# Altium PCB roneCPUBoard-v12.PcbDoc (part 2 of 3)
Units mil, origin at the board's own origin, x right, y up, seen from the top; angles counter-clockwise.
Board outline 3915.64 x 3915.87 mil, 2 copper layers (Top Layer, Bottom Layer); 205 components, 158 nets, 752 pads, 409 vias.
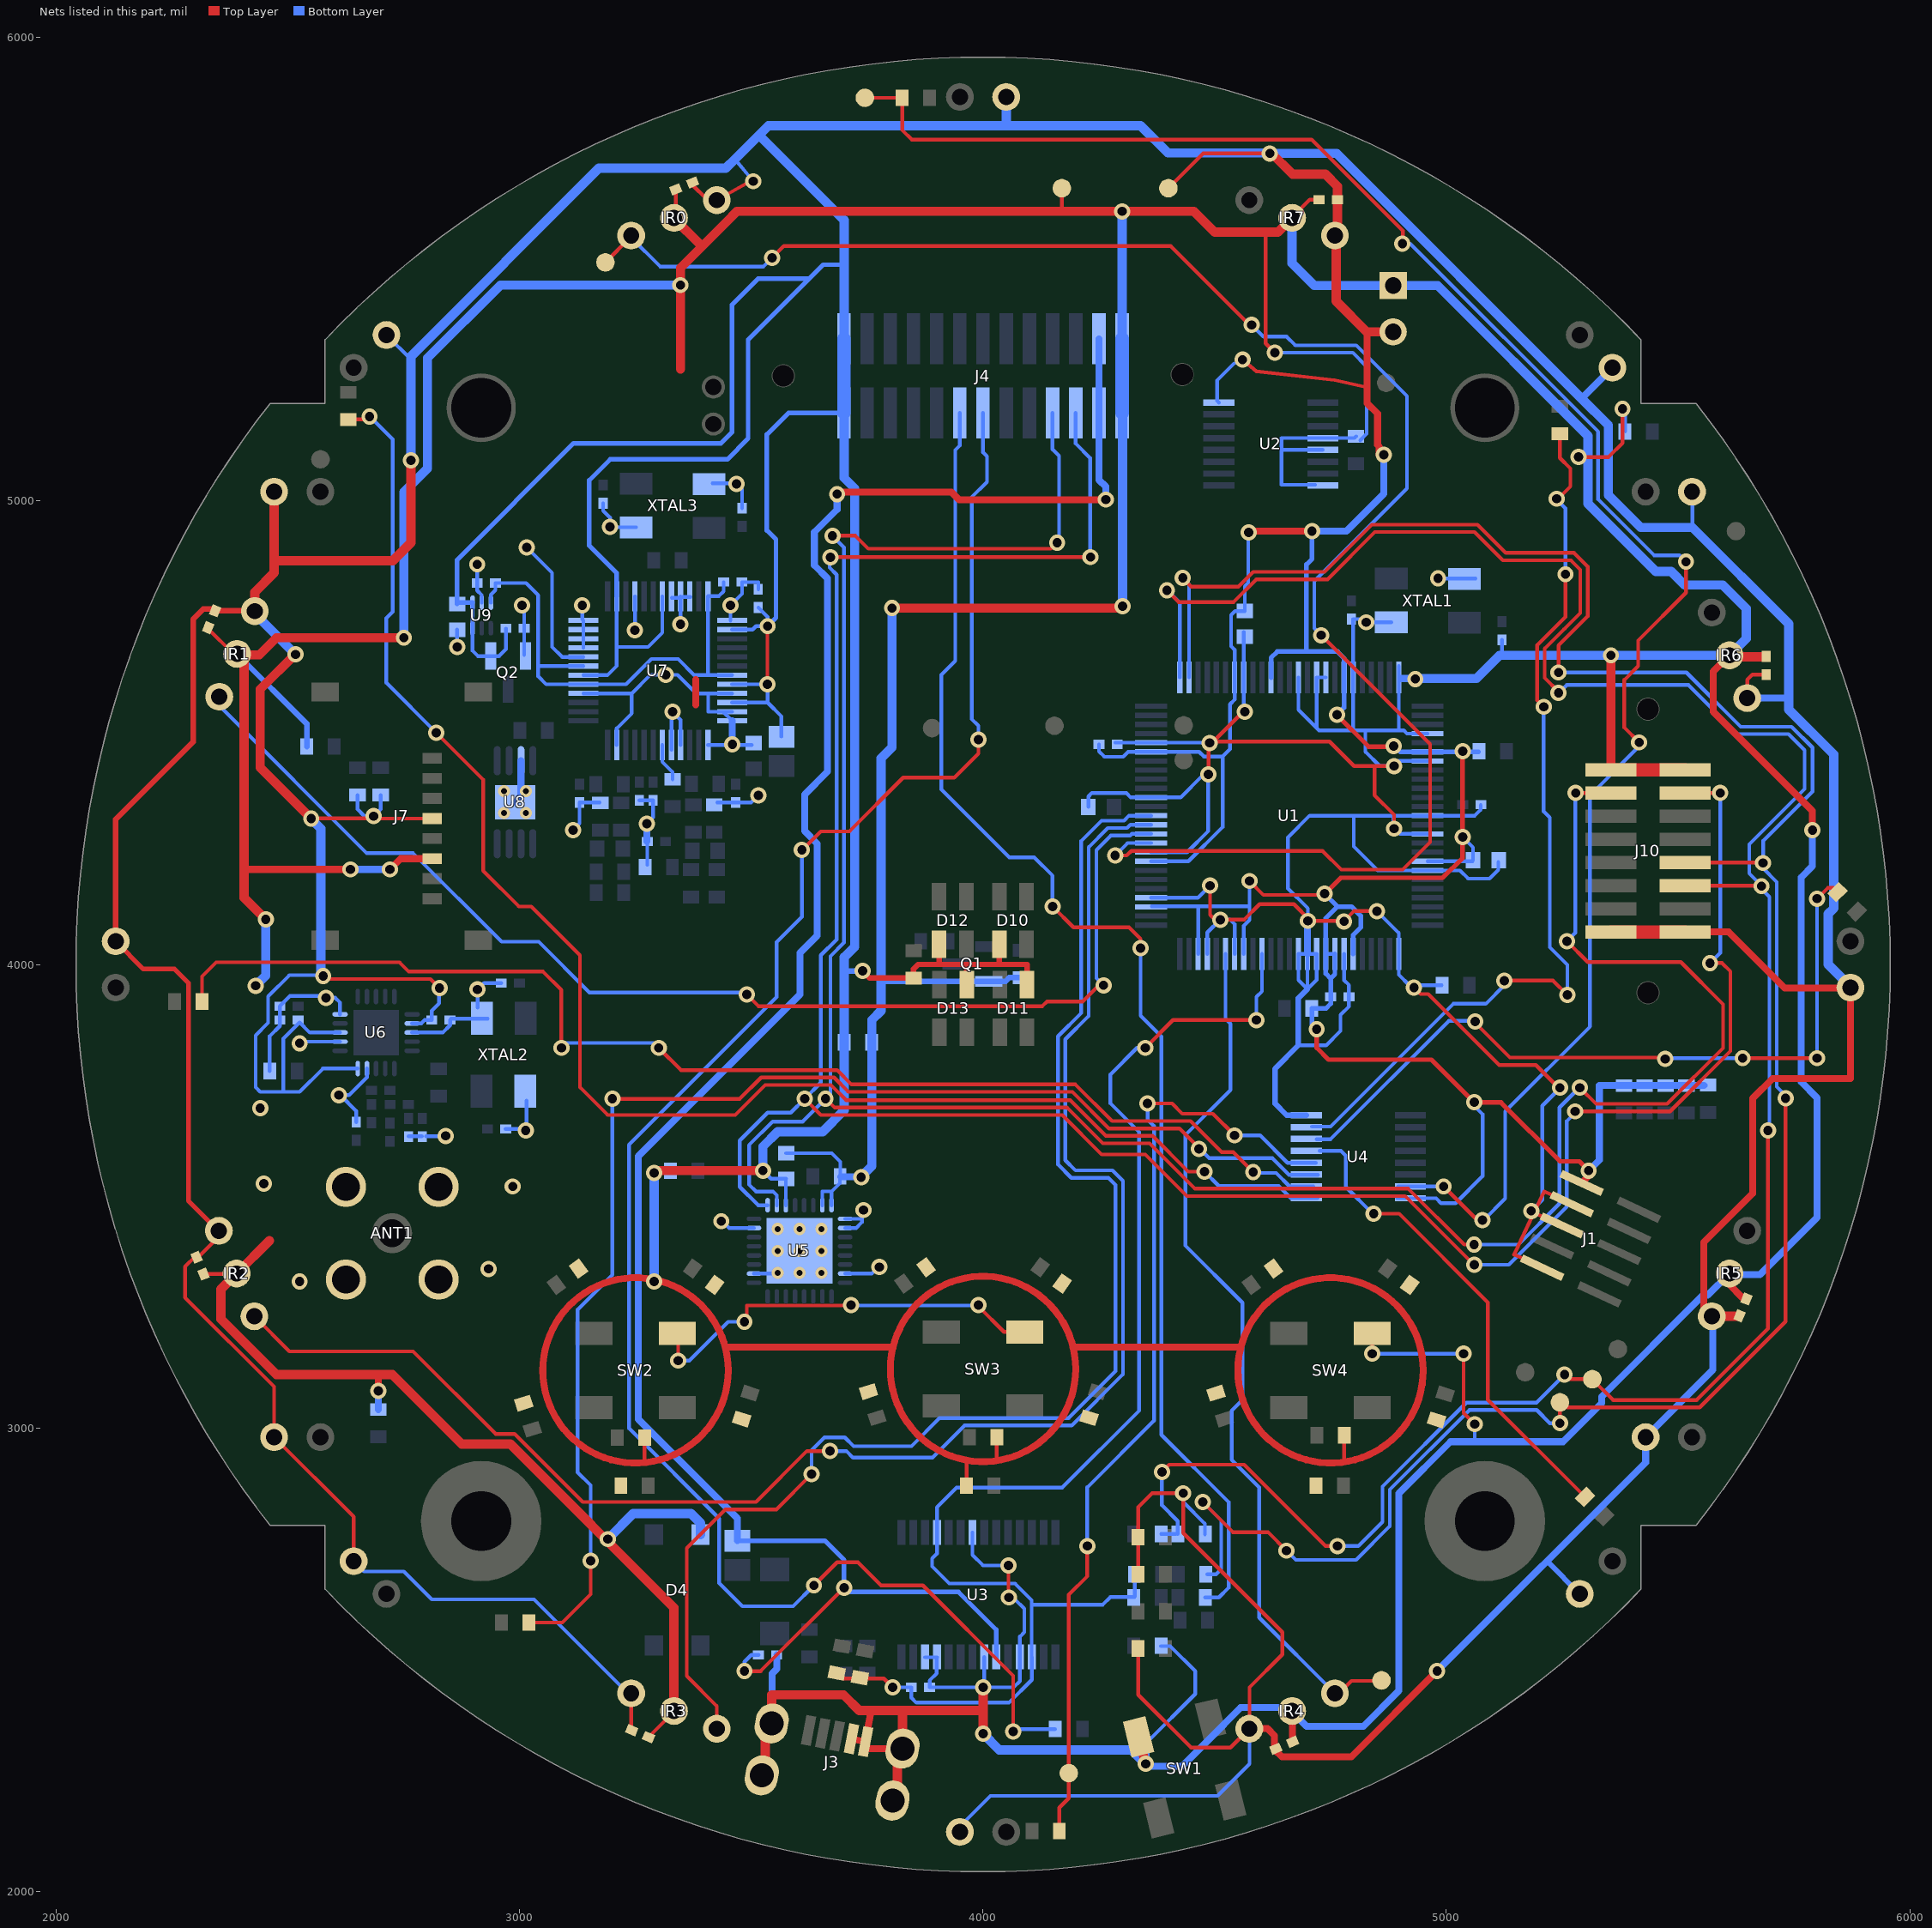
[diagram p2: the nets of this part, all layers, seen from the top]

## Via types
v1: diameter 35, hole 20, Top Layer to Bottom Layer, tented top, 392 vias
v2: diameter 25.98, hole 12.99, Top Layer to Bottom Layer, tented top, 17 vias

## Nets (pads, with @x,y where several pads share a name; then routed paths per layer and width w, separated by ;. In a path a pad name is that pad's centre, name@x,y a point inside that pad or via, vN(x,y) a via of type N, cw(c..) or ccw(c..) an arc to the next point about the centre after c; other vN are vias at no path point)
3.3V: C5.2 C6.2 C7.2 C8.2 C11.2 C12.2 C13.2 C14.2 C15.2 C16.2 C17.2 C18.2 C19.2 C20.2 C21.2 C31.2 C32.2 C42.1 D1.1 D3.1 D10.4 D11.4 D12.4 D13.4 D14.1 D15.1 D16.1 D17.1 D18.1 D19.1 D20.1 D21.1 D22.1 D23.1 D24.1 D25.1 D26.1 D27.1 D28.1 D29.1 D30.1 IR0.3 IR1.3 IR2.3 IR3.3 IR4.3 IR5.3 IR6.3 IR7.3 J1.1 J4.1 J4.2 J6.2 J7.4 J10.1 J10.2 L5.2 Q2.1 R1.2 R2.2 R3.2 R4.1 R7.2 R8.2 R9.2 R10.2 R11.2 R19.1 R34.2 R37.2 R39.2 R41.2 R43.2 R44.2 R45.2 R46.2 R50.2 T0.2 T1.2 T2.2 T3.2 T4.2 T5.2 T6.2 T7.2 T_1.1 U1.3 U1.8 U1.20 U1.32 U1.36 U1.44 U1.56 U1.68 U1.81 U1.83 U1.84 U1.93 U1.98 U2.16 U4.16 U5.27 U6.7 U6.15 U6.18 U7.6 U7.14 U7.19 U7.26 U7.32 U7.34 U9.1 U9.6 | length 170619.4
  Top Layer w8: C13.2@2300.33,3370.33 2278,3348 2278,3280.89 2470,3088.89 R41.2@2470,2980 2641.64,2808.36 T3.2@2641.64,2712.36 ; C13.2@2304.33,3366.33 IR2.3@2348.34,3410.34 ; v1@2551,4315 v1@2680,4315 ; v1@2582.5,3968.5 2807.5,3968.5 v1(2827,3949) ; v1@2690.12,4314.88 J7.4@2811.02,4314.88 ; C14.2@3240.61,2349.83 IR3.3@3240.61,2427.27 ; 3269.53,2926.47 R44.2@3269.53,2979 ; C11.2@3373.19,5681.81 IR0.3@3403,5652 ; IR0.3@3425.39,5649.27 v1@3502.53,5692.61 ; v1(3534.47,4604.47) v1@3534.47,4729.47 ; D20.1@3964.47,2875 3964.47,2927.47 ; 4029.53,2929.86 R45.2@4029.53,2980 ; D3.1@4335,2528 4335,2424 4449,2310 4533.88,2310 IR4.3@4574.61,2350.73 ; D26.1@4335,2685 4335,2829 4365,2859 v1@4430,2859 ; T_1.1@4400,5675 4475,5750 v1(4619,5750) ; v1(4432,2859) 4432,2773 4646,2559 4646,2511 4575,2440 IR4.3@4575,2351 ; v1(4560,5305) 4590,5280 4758.75,5260.75 4825,5246 ; v1(4575,4180) 4605,4150 v1@4740,4150 ; 4779.53,2927.53 R46.2@4779.53,2984 ; v1@5024,4460 v1@5035,4449 ; IR5.3@5555.53,3257.47 IR5.3@5572.56,3240.44 ; IR6.3@5649.27,4574.61 5649.27,4614.27 5660.31,4625.31 C18.2@5690,4625.31
  Top Layer w10: T2.2@2128,4050 2188,3990 2255,3990 2285,3960 2285,3490 IR2.3@2347,3428 ; v1(4720,3860) 4720,3820 4745.5,3794.5 4967.5,3794.5 5060,3702 5118,3702 5245,3575 5287,3575 v1(5307,3555) ; v1@4738,4153 4772,4187 4992,4187 5035,4230 5035,4263 v1@5023,4275 ; v1@4765,4537 4832,4470 v1@4886,4470 ; v1(5035,4275) v1@5035,4449
  Top Layer w12: T2.2@2128,4052 2128,4313 2295,4480 2295,4745 2317,4767 C12.2@2337,4767 ; C12.2@2342.53,4763.19 IR1.3@2417.81,4763.19 ; v1(3740,3985.94) 3755.47,3970.47 D14.1@3850,3970.47 3850,3990 3860,4000 3905,4000 ; D12.4@3905,4043.82 3905,4000 ; D13.4@3965,3967 3965,4000 ; D10.4@4035,4043.82 4035,4000 ; D11.4@4095,3956.18 4095,4000 4035,4000 ; 3905,4000 3965,4000 ; 3965,4000 4035,4000
  Top Layer w15: 3444,3174 3806,3174 ; 4194,3174 4552,3174 ; IR4.3@4575,2351 4614,2351 4629,2336 4629,2306 4645,2290 4795,2290 v1(4980,2475) ; v1@4576,4935 v1(4710,4935) ; 4830,5365 4829,5364 4829,5211 4851.5,5188.5 4851.5,5121.42 4855,5117.92 v1@4855,5100 ; J1.1@5291.87,3528.13 5307,3543.26 v1(5307,3555) ; J10.1@5515.02,4070 5609,4070 5730,3949 5872,3949 5872,3754 5704,3754 5661,3711 5661,3506 5555.53,3400.53 IR5.3@5555.53,3257.47 ; 3800,3127 cw(c4000,3127) 4200,3127 ; 3800,3127 cw(c4000,3127) 4200,3127 ; 3800,3127 cw(c4000,3127) 4200,3127 ; 3800,3127 cw(c4000,3127) 4200,3127 ; 3800,3127 cw(c4000,3127) 4200,3127 ; 3800,3127 cw(c4000,3127) 4200,3127 ; 3800,3127 cw(c4000,3127) 4200,3127 ; 3800,3127 cw(c4000,3127) 4200,3127 ; 3800,3127 cw(c4000,3127) 4200,3127 ; 3800,3127 cw(c4000,3127) 4200,3127 ; 3800,3127 cw(c4000,3127) 4200,3127 ; 3800,3127 cw(c4000,3127) 4200,3127 ; 3800,3127 cw(c4000,3127) 4200,3127 ; 3800,3127 cw(c4000,3127) 4200,3127 ; 3800,3127 cw(c4000,3127) 4200,3127 ; 3800,3127 cw(c4000,3127) 4200,3127 ; 3800,3127 cw(c4000,3127) 4200,3127 ; 3800,3127 cw(c4000,3127) 4200,3127 ; 3800,3127 cw(c4000,3127) 4200,3127 ; 3800,3127 cw(c4000,3127) 4200,3127 ; 3800,3127 cw(c4000,3127) 4200,3127 ; 3800,3127 cw(c4000,3127) 4200,3127 ; 3800,3127 cw(c4000,3127) 4200,3127 ; 3800,3127 cw(c4000,3127) 4200,3127 ; 3800,3127 cw(c4000,3127) 4200,3127 ; 3800,3127 cw(c4000,3127) 4200,3127 ; 3800,3127 cw(c4000,3127) 4200,3127 ; 3800,3127 cw(c4000,3127) 4200,3127 ; 3800,3127 cw(c4000,3127) 4200,3127 ; 3800,3127 cw(c4000,3127) 4200,3127 ; 3800,3127 cw(c4000,3127) 4200,3127 ; 3800,3127 cw(c4000,3127) 4200,3127 ; 3800,3127 cw(c4000,3127) 4200,3127 ; 3800,3127 cw(c4000,3127) 4200,3127 ; 3800,3127 cw(c4000,3127) 4200,3127 ; 3800,3127 cw(c4000,3127) 4200,3127 ; 3800,3127 cw(c4000,3127) 4200,3127 ; 3800,3127 cw(c4000,3127) 4200,3127 ; 3800,3127 cw(c4000,3127) 4200,3127 ; 3800,3127 cw(c4000,3127) 4200,3127 ; 3800,3127 cw(c4000,3127) 4200,3127 ; 3800,3127 cw(c4000,3127) 4200,3127 ; 3800,3127 cw(c4000,3127) 4200,3127 ; 3800,3127 cw(c4000,3127) 4200,3127 ; 3800,3127 cw(c4000,3127) 4200,3127 ; 3800,3127 cw(c4000,3127) 4200,3127 ; 3800,3127 cw(c4000,3127) 4200,3127 ; 3800,3127 cw(c4000,3127) 4200,3127 ; 3800,3127 cw(c4000,3127) 4200,3127 ; 3800,3127 cw(c4000,3127) 4200,3127 ; 3800,3127 cw(c4000,3127) 4200,3127 ; 3800,3127 cw(c4000,3127) 4200,3127 ; 3800,3127 cw(c4000,3127) 4200,3127 ; 3800,3127 cw(c4000,3127) 4200,3127 ; 3800,3127 cw(c4000,3127) 4200,3127 ; 3800,3127 cw(c4000,3127) 4200,3127 ; 3800,3127 cw(c4000,3127) 4200,3127 ; 3800,3127 cw(c4000,3127) 4200,3127 ; 3800,3127 cw(c4000,3127) 4200,3127 ; 3800,3127 cw(c4000,3127) 4200,3127 ; 3800,3127 cw(c4000,3127) 4200,3127 ; 3800,3127 cw(c4000,3127) 4200,3127 ; 3800,3127 cw(c4000,3127) 4200,3127 ; 3800,3127 cw(c4000,3127) 4200,3127 ; 3800,3127 cw(c4000,3127) 4200,3127 ; 3800,3127 cw(c4000,3127) 4200,3127 ; 3800,3127 cw(c4000,3127) 4200,3127 ; 3800,3127 cw(c4000,3127) 4200,3127 ; 3800,3127 cw(c4000,3127) 4200,3127 ; 3800,3127 cw(c4000,3127) 4200,3127 ; 3800,3127 cw(c4000,3127) 4200,3127 ; 3800,3127 cw(c4000,3127) 4200,3127 ; 3800,3127 cw(c4000,3127) 4200,3127 ; 3800,3127 cw(c4000,3127) 4200,3127 ; 3800,3127 cw(c4000,3127) 4200,3127 ; 3800,3127 cw(c4000,3127) 4200,3127 ; 3800,3127 cw(c4000,3127) 4200,3127 ; 3800,3127 cw(c4000,3127) 4200,3127 ; 3800,3127 cw(c4000,3127) 4200,3127 ; 3800,3127 cw(c4000,3127) 4200,3127 ; 3800,3127 cw(c4000,3127) 4200,3127 ; 3800,3127 cw(c4000,3127) 4200,3127 ; 3800,3127 cw(c4000,3127) 4200,3127 ; 3800,3127 cw(c4000,3127) 4200,3127 ; 3800,3127 cw(c4000,3127) 4200,3127 ; 3800,3127 cw(c4000,3127) 4200,3127 ; 3800,3127 cw(c4000,3127) 4200,3127 ; 3800,3127 cw(c4000,3127) 4200,3127 ; 3800,3127 cw(c4000,3127) 4200,3127 ; 3800,3127 cw(c4000,3127) 4200,3127 ; 3800,3127 cw(c4000,3127) 4200,3127 ; 3800,3127 cw(c4000,3127) 4200,3127 ; 3800,3127 cw(c4000,3127) 4200,3127 ; 3800,3127 cw(c4000,3127) 4200,3127 ; 3800,3127 cw(c4000,3127) 4200,3127 ; 3800,3127 cw(c4000,3127) 4200,3127 ; 3800,3127 cw(c4000,3127) 4200,3127 ; 3800,3127 cw(c4000,3127) 4200,3127 ; 3800,3127 cw(c4000,3127) 4200,3127 ; 3800,3127 cw(c4000,3127) 4200,3127 ; 3800,3127 cw(c4000,3127) 4200,3127 ; 3800,3127 cw(c4000,3127) 4200,3127 ; 3800,3127 cw(c4000,3127) 4200,3127 ; 3800,3127 cw(c4000,3127) 4200,3127 ; 3800,3127 cw(c4000,3127) 4200,3127 ; 3800,3127 cw(c4000,3127) 4200,3127 ; 3800,3127 cw(c4000,3127) 4200,3127 ; 3800,3127 cw(c4000,3127) 4200,3127 ; 3800,3127 cw(c4000,3127) 4200,3127 ; 3800,3127 cw(c4000,3127) 4200,3127 ; 3800,3127 cw(c4000,3127) 4200,3127 ; 3800,3127 cw(c4000,3127) 4200,3127 ; 3800,3127 cw(c4000,3127) 4200,3127 ; 3800,3127 cw(c4000,3127) 4200,3127 ; 3800,3127 cw(c4000,3127) 4200,3127 ; 3800,3127 cw(c4000,3127) 4200,3127 ; 3800,3127 cw(c4000,3127) 4200,3127 ; 3800,3127 cw(c4000,3127) 4200,3127 ; 3800,3127 cw(c4000,3127) 4200,3127 ; 3800,3127 cw(c4000,3127) 4200,3127 ; 3800,3127 cw(c4000,3127) 4200,3127 ; 3800,3127 cw(c4000,3127) 4200,3127 ; 3800,3127 cw(c4000,3127) 4200,3127 ; 3800,3127 cw(c4000,3127) 4200,3127 ; 3800,3127 cw(c4000,3127) 4200,3127 ; 3800,3127 cw(c4000,3127) 4200,3127 ; 3800,3127 cw(c4000,3127) 4200,3127 ; 3800,3127 cw(c4000,3127) 4200,3127 ; 3800,3127 cw(c4000,3127) 4200,3127 ; 3800,3127 cw(c4000,3127) 4200,3127 ; 3800,3127 cw(c4000,3127) 4200,3127 ; 3800,3127 cw(c4000,3127) 4200,3127 ; 3800,3127 cw(c4000,3127) 4200,3127 ; 3800,3127 cw(c4000,3127) 4200,3127 ; 3800,3127 cw(c4000,3127) 4200,3127 ; 3800,3127 cw(c4000,3127) 4200,3127 ; 3800,3127 cw(c4000,3127) 4200,3127 ; 3800,3127 ccw(c4000,3127) 4200,3127 ; 3800,3127 ccw(c4000,3127) 4200,3127 ; 3800,3127 ccw(c4000,3127) 4200,3127 ; 3800,3127 ccw(c4000,3127) 4200,3127 ; 3800,3127 ccw(c4000,3127) 4200,3127 ; 3800,3127 ccw(c4000,3127) 4200,3127 ; 3800,3127 ccw(c4000,3127) 4200,3127 ; 3800,3127 ccw(c4000,3127) 4200,3127 ; 3800,3127 ccw(c4000,3127) 4200,3127 ; 3800,3127 ccw(c4000,3127) 4200,3127 ; 3800,3127 ccw(c4000,3127) 4200,3127 ; 3800,3127 ccw(c4000,3127) 4200,3127 ; 3800,3127 ccw(c4000,3127) 4200,3127 ; 3800,3127 ccw(c4000,3127) 4200,3127 ; 3800,3127 ccw(c4000,3127) 4200,3127 ; 3800,3127 ccw(c4000,3127) 4200,3127 ; 3800,3127 ccw(c4000,3127) 4200,3127 ; 3800,3127 ccw(c4000,3127) 4200,3127 ; 3800,3127 ccw(c4000,3127) 4200,3127 ; 3800,3127 ccw(c4000,3127) 4200,3127 ; 3800,3127 ccw(c4000,3127) 4200,3127 ; 3800,3127 ccw(c4000,3127) 4200,3127 ; 3800,3127 ccw(c4000,3127) 4200,3127 ; 3800,3127 ccw(c4000,3127) 4200,3127 ; 3800,3127 ccw(c4000,3127) 4200,3127 ; 3800,3127 ccw(c4000,3127) 4200,3127 ; 3800,3127 ccw(c4000,3127) 4200,3127 ; 3800,3127 ccw(c4000,3127) 4200,3127 ; 3800,3127 ccw(c4000,3127) 4200,3127 ; 3800,3127 ccw(c4000,3127) 4200,3127 ; 3800,3127 ccw(c4000,3127) 4200,3127 ; 3800,3127 ccw(c4000,3127) 4200,3127 ; 3800,3127 ccw(c4000,3127) 4200,3127 ; 3800,3127 ccw(c4000,3127) 4200,3127 ; 3800,3127 ccw(c4000,3127) 4200,3127 ; 3800,3127 ccw(c4000,3127) 4200,3127 ; 3800,3127 ccw(c4000,3127) 4200,3127 ; 3800,3127 ccw(c4000,3127) 4200,3127 ; 3800,3127 ccw(c4000,3127) 4200,3127 ; 3800,3127 ccw(c4000,3127) 4200,3127 ; 3800,3127 ccw(c4000,3127) 4200,3127 ; 3800,3127 ccw(c4000,3127) 4200,3127 ; 3800,3127 ccw(c4000,3127) 4200,3127 ; 3800,3127 ccw(c4000,3127) 4200,3127 ; 3800,3127 ccw(c4000,3127) 4200,3127 ; 3800,3127 ccw(c4000,3127) 4200,3127 ; 3800,3127 ccw(c4000,3127) 4200,3127 ; 3800,3127 ccw(c4000,3127) 4200,3127 ; 3800,3127 ccw(c4000,3127) 4200,3127 ; 3800,3127 ccw(c4000,3127) 4200,3127 ; 3800,3127 ccw(c4000,3127) 4200,3127 ; 3800,3127 ccw(c4000,3127) 4200,3127 ; 3800,3127 ccw(c4000,3127) 4200,3127 ; 3800,3127 ccw(c4000,3127) 4200,3127 ; 3800,3127 ccw(c4000,3127) 4200,3127 ; 3800,3127 ccw(c4000,3127) 4200,3127 ; 3800,3127 ccw(c4000,3127) 4200,3127 ; 3800,3127 ccw(c4000,3127) 4200,3127 ; 3800,3127 ccw(c4000,3127) 4200,3127 ; 3800,3127 ccw(c4000,3127) 4200,3127 ; 3800,3127 ccw(c4000,3127) 4200,3127 ; 3800,3127 ccw(c4000,3127) 4200,3127 ; 3800,3127 ccw(c4000,3127) 4200,3127 ; 3800,3127 ccw(c4000,3127) 4200,3127 ; 3800,3127 ccw(c4000,3127) 4200,3127 ; 3800,3127 ccw(c4000,3127) 4200,3127 ; 3800,3127 ccw(c4000,3127) 4200,3127 ; 3800,3127 ccw(c4000,3127) 4200,3127 ; 3800,3127 ccw(c4000,3127) 4200,3127 ; 3800,3127 ccw(c4000,3127) 4200,3127 ; 3800,3127 ccw(c4000,3127) 4200,3127 ; 3800,3127 ccw(c4000,3127) 4200,3127 ; 3800,3127 ccw(c4000,3127) 4200,3127 ; 3800,3127 ccw(c4000,3127) 4200,3127 ; 3800,3127 ccw(c4000,3127) 4200,3127 ; 4200,3127 ccw(c4000,3127) 4200,3127 ; 3450,3124 ccw(c3250,3124) 3450,3124 ; 4950,3124 ccw(c4750,3124) 4950,3124
  Top Layer w20: IR1.3@2428.27,4762.39 2428.27,4803.27 2470,4845 R37.2@2470,5020 ; 2476.19,4871.19 2726.2,4871.19 2765,4909.98 v1(2765,5088) ; v1@2516.08,4669.92 2440,4593.83 2440,4425 v1(2550,4315) ; v1@3296,3555 v1(3525,3555) ; v1@4622,5751 4668,5705 4739,5705 4765,5679 C17.2@4765,5650 ; IR7.3@4762,5574.12 4762,5431 4829,5364 ; IR7.3@4764.69,5580.69 C17.2@4764.69,5650 ; 4830,5365 J6.2@4885,5365 ; IR5.3@5572.73,3240.61 C16.2@5629.61,3240.61
  Top Layer w29: J10.2@5354.98,4070 J10.1@5515.02,4070
  Bottom Layer w8: v1@2574,3977 2503,3977 2457,3931 2457,3873.93 2430,3846.93 2430,3735 2440,3725 2490,3725 ; U6.18@2612.24,3853 2547,3853 2525,3875 2490,3840 2490,3725 ; T3.2@2641.64,2712.36 2664,2690 2750,2690 2810,2630 3031,2630 IR3.3@3232.12,2428.88 ; R1.2@2650,4365.47 2650,4335 2665,4320 v1(2685,4320) 2700,4335 R2.2@2700,4365 ; U6.15@2650.63,3775.24 2575.24,3775.24 2525,3725 2490,3725 ; T1.2@2712.36,5358.36 2764.71,5306 ; U6.7@2767.76,3872.69 2787.69,3872.69 2795,3880 C21.2@2810.31,3880 ; C21.2@2810,3880.31 2810,3900 2826,3916 v1@2826,3947 ; U9.1@2898.31,4780.56 U9.6@2898.31,4725.44 2898.31,4676.69 2909.57,4665.43 Q2.1@2937.6,4665.43 2955.43,4665.43 2970.31,4680.31 C32.2@2970.31,4725 ; U7.6@3137.57,4624.16 3189.16,4624.16 3209.42,4644.42 3209.42,4685 ; U7.14@3209.42,4794.43 3209.42,4685 ; U7.19@3307.84,4794.43 3307.84,4715.84 3277,4685 3209.42,4685 ; U7.34@3458.43,4565.1 3534.9,4565.1 ; U7.32@3458.43,4604.47 v1(3534.47,4604.47) ; U7.26@3458.43,4722.58 3502.58,4722.58 3510,4730 v1(3535,4730) 3535,4750 C31.2@3515,4770 ; 3465,5738 v1(3504,5690) ; v1(3525,3555) 3542.56,3537.44 C19.2@3575,3537.44 ; v1@3534.9,4604.05 3534.9,4565.1 ; L5.2@3564.9,4491.5 3564.9,4535.1 3534.9,4565.1 ; U5.27@3574.47,3480.43 C19.2@3574.47,3533.47 ; T4.2@3950,2140 4016,2206 4506,2206 4575,2275 IR4.3@4575,2351 ; C5.2@4250.31,4475 4250.31,4459.69 4262,4448 4302.37,4448 4313.17,4458.8 4466.48,4458.8 4476.78,4448.5 4517,4448.5 ; U1.8@4362.77,4222.57 4443.2,4222.57 4517,4296.37 4517,4448.5 ; U1.3@4364.12,4125.5 4575,4125.5 ; v1(4432,2859) 4432,2840 4479,2793 R19.1@4479,2770 ; U1.98@4464.5,4022.5 4464.5,4125 ; U2.16@4508.8,5212.57 4505,5216.36 4505,5260 4542,5297 ; U1.93@4562.57,4022.77 4562.57,4083.29 4575,4095.72 4575,4125.5 ; v1@4572.5,4935.72 4572.5,4823.5 4565,4816 C7.2@4565,4762.56 4543.93,4762.56 4535.28,4753.91 4535.28,4686.72 4542.89,4679.11 4542.89,4571.46 4533.07,4561.65 4533.07,4464.57 4517,4448.5 ; v1(4575,4180) 4575,4125.5 ; U1.84@4739.74,4022.77 U1.83@4759.43,4022.77 ; U4.16@4893.66,3495.43 4977.85,3495.43 4988.28,3485 5020,3485 5078,3543 5078,3677 v1@5060,3695 ; U1.68@4959.23,4222.57 C8.2@5056.57,4222.57 ; v1(5035,4275) 5057.44,4252.56 C8.2@5057.44,4225 ; 5531,4943 R39.2@5531,5012
  Bottom Layer w10: C42.1@2865,4777.56 2865,4873 3116.5,5124.5 3434.5,5124.5 3458,5148 3458,5423 3515,5480 3625,5480 ; C42.1@2868,4780.56 U9.1@2898.31,4780.56 ; U7.14@3209.42,4794.43 3209.42,4844.42 3150,4903.83 3150,5044.72 3195.28,5090 3448.08,5090 3493,5134.92 3493,5348 3625,5480 ; v1(3535,4730) 3553,4748 3553,4917 3533.5,4936.5 3533.5,5143.5 3579.98,5189.98 J4.2@3700,5189.98 ; 3700,5510 3655,5510 3625,5480 ; U1.36@4621.63,4619.23 4621.63,4661.63 4635,4675 4698,4675 ; v1(4710,4935) 4710,4875 4698,4863 4698,4675 ; v1(4720,3860) 4709.53,3870.47 R4.1@4709.53,3905 4740,3905 4750.31,3915.31 C6.2@4750.31,3930 4750.31,3969.69 ; v1@4736.64,4152.64 4764.64,4124.64 ; U1.83@4759.43,4022.77 4759.43,3978.8 4750.31,3969.69 ; v1(4764,4539) 4779.11,4554.11 U1.44@4779.11,4619.23 4779.11,4660.89 4765,4675 4698,4675 ; U1.81@4798.8,4022.77 4798.8,4063.8 4815,4080 4815,4105 4795.36,4124.64 4764.64,4124.64 ; v1@4890,4469 4900.2,4458.8 U1.56@4959.23,4458.8 R3.2@5068.8,4458.8 ; 4750.31,3969.69 4739.74,3980.26 U1.84@4739.74,4022.77 4739.74,4099.74 4764.64,4124.64
  Bottom Layer w12: 3701.42,3985.94 v1(3740,3985.94) ; 5220,2710 T5.2@5287.64,2641.64
  Bottom Layer w15: v1@3282,3320 v1@3290,3328 ; v1@3290,3555 R34.2@3325.47,3555 ; v1(4710,4935) 4784.67,4935 4865,5015.33 v1(4865,5100) ; v1@4987.4,2482.4 5430,2925 R43.2@5430,2975 ; 5291.86,5221.14 T7.2@5358.36,5287.64 ; v1@5307.5,3555.5 5330,3578 5330,3739 5473,3739 R11.2@5556,3739 ; R43.2@5430,2980 5575,3125 IR5.3@5575,3240 ; IR6.3@5649.27,4574.61 5739,4574.61
  Bottom Layer w20: IR1.3@2428.27,4756.73 v1(2516,4669) ; v1@2546.5,4317.5 2571,4293 v1@2571,3980 ; v1(2765,5088) 2765,5312 3171,5718 3445,5718 3465,5738 3516.66,5789.66 ; v1@3290,3328 v1(3290,3550) ; v1(3525,3555) 3525,3607 3557,3639 3654,3639 3700,3685 R50.2@3700,3831.53 ; J4.2@3700,5180 3700,5050.2 3723,5027.2 3723,4038 3700.47,4015.47 R50.2@3700.47,3832 ; J4.1@3700,5350.02 3700,5510 3700,5606.31 3516.66,5789.66 ; T0.2@4050,5872 4050,5810 ; v1@4616,5751 4399,5751 4340,5810 4050,5810 ; v1@4627,5750 4763,5750 5291.86,5221.14 5349.5,5163.5 5349.5,5012.73 5419.23,4943 5531,4943 5739,4735 5739,4574.61 5739,4550 5836,4453 5836,4121 5824,4109 5824,4000 T6.2@5872,3952 ; 3516.66,5789.66 3537,5810 4050,5810
  Bottom Layer w29.14: J4.2@3700,5189.98 J4.1@3700,5350.02
  other v1: 3290,3316 5060,3703 2576,3975 4737,4153 5035,4460 4886,4471 4573,4932
3.3V_FTDI: C10.2 D8.1 D9.1 R15.1 R18.1 U1.91 U3.4 U3.17 | length 3094.4
  Top Layer w8: D9.1@3685.21,2471.79 3697.93,2459.07 3759.04,2459.07 ; 3753,2459 3786,2459 v1(3805,2440) ; v1(4350,3820) 4410,3880 v1@4589,3880
  Bottom Layer w8: v1(3805,2440) C10.2@3845.31,2440 3845.31,2417.69 3856,2407 4055.75,2407 4105.16,2456.41 U3.17@4105.16,2505.55 ; U3.17@4105,2506 4105,2628 4069,2664 3927,2664 3890,2701 3890,2718.13 3900.43,2728.57 U3.4@3900.43,2774.45 3900.43,2828.57 3942.87,2871 4170.75,2871 4337,3037.25 4337,3638 4275,3700 4275,3762.72 4332.28,3820 v1(4350,3820) ; 4105,2618.5 4258.5,2618.5 4275,2635 R15.1@4327,2635 ; R15.1@4327.47,2636.47 R18.1@4327.47,2683 ; v1(4590,3880) 4590,3930 4601.94,3941.94 U1.91@4601.94,4022.77
5VUSB: C9.2 J4.23 J4.24 L1.2 U3.20 | length 4587.3
  Top Layer w8: v1(3485,2475) 3520,2475 v1(3700,2655)
  Top Layer w15: v1@3681,5019 3932,5019 3948.5,5002.5 v1@4265,5002.5
  Bottom Layer w8: v1(3485,2475) 3485,2495 3500,2510 C9.2@3515.31,2510
  Bottom Layer w10: L1.2@3470,2756.5 3658.5,2756.5 3700,2715 v1(3700,2655) ; v1@3705,2655 3714,2646 3947,2646 4028.39,2564.61 U3.20@4028.39,2505.55
  Bottom Layer w15: L1.2@3470,2756.5 3470,2805 3256,3019 3256,3586 3605,3935 3605,4025 3642,4062 3642,4260.67 3615,4287.67 3615,4366.67 3664.5,4416.17 3664.5,4832.92 3636,4861.42 3636,4932.67 3685,4981.67 v1(3685,5015) ; J4.24@4250,5189.98 J4.23@4250,5350.02 ; J4.24@4250.5,5189.48 4250.5,5045.5 4265,5031 v1(4265,5003)
CHRG: J4.14 R13.1 | length 4048
  Top Layer w8: v1@3610,4247 3650,4287 3711.63,4287 3827.63,4403 3938,4403 3990,4455 v1(3990,4485) ; v1(3635,2660) 3685,2710 3730,2710 3780,2660 3870,2660 4065,2465 v1(4065,2345)
  Bottom Layer w8: v1(3609,4247) 3609,4102.72 3554.5,4048.22 3554.5,3929.5 3236,3611 3236,2999 3430.44,2804.56 3430.44,2664.91 3480.35,2615 3590,2615 v1(3635,2660) ; v1(3990,4485) 3990,4515 3975.5,4529.5 3975.5,5008.13 4008.5,5041.13 4008.5,5096.5 4000,5105 J4.14@4000,5189.98 ; v1@4065,2350 R13.1@4155.47,2350
CVDD: C33.2 C34.2 U7.5 U7.7 U7.24 U7.31 U9.3 | length 1110.5
  Bottom Layer w8: U9.3@2937.69,4780.56 2937.69,4797.69 2947.69,4807.69 C34.2@2947.69,4823 3013.72,4823 3040,4796.72 3040,4643.84 ; U7.7@3137.57,4643.84 3040,4643.84 ; 3406.27,4626.27 U7.24@3406.27,4794.43 ; U7.24@3406.83,4795 3430,4795 3440,4805 C33.2@3440,4825 ; U7.31@3458.43,4624.16 3376.84,4624.16 3342,4659 3284,4659 3229.47,4604.47 U7.5@3137.57,4604.47 3057.09,4604.47 3040,4621.56 3040,4643.84
DREQ: U7.8 | length 314.2
  Bottom Layer w8: v1(3015,4900) 3070,4845 3070,4685 3091.47,4663.53 U7.8@3137.57,4663.53
FTDI_RESET: D5.1 J4.12 | length 2969.3
  Top Layer w8: v1(4150,4125) 4195,4080 4315,4080 4340,4055 v1(4340,4035)
  Bottom Layer w8: J4.12@3950,5189.98 3950,5120 3940,5110 3940,4655 3910,4625 3910,4377.65 4056.65,4231 4110.37,4231 4150,4191.37 v1(4150,4125) ; v1(4340,4035) 4340,3889.35 4385,3844.35 4385,2985 4530,2840 4530,2655 4509,2634 D5.1@4479.53,2634
FTDI_RX: D6.2 J10.5 R19.2 T_RX1.1 U1.26 | length 5425.7
  Top Layer w8: v1(4386,2905) 4401.5,2920.5 4563.5,2920.5 4739,2745 v1(4765,2745) ; v1(4397,4807) 4422,4782 4540.75,4782 4589.75,4831 4743.6,4831 4845.6,4933 5060.63,4933 5121.63,4872 5268.72,4872 5289,4851.72 5289,4758.14 5254.87,4724.01 ; v1@5242,4588.28 5212,4618.28 5212,4681.63 5254.38,4724.01 ; v1(5255,3115) 5265,3105 T_RX1.1@5315,3105 5360,3060 5540,3060 5694,3214 v1(5694,3642) ; J10.5@5515.02,4170 v1@5680,4170
  Bottom Layer w8: D6.2@4384.53,2771 R19.2@4416,2771 ; v1(4386,2905) 4386,2833 4420,2799 R19.2@4420,2771 ; v1@4398,4807 4424.78,4780.22 U1.26@4424.78,4619.23 ; v1(4765,2745) 4810,2745 4862,2797 4862,2873.35 5043.15,3054.5 5194.5,3054.5 v1(5255,3115) ; v1@5243,4586 5260,4603 5522.37,4603 5628.37,4497 5738.26,4497 5773,4462.26 5773,4378.63 5653.5,4259.13 5653.5,4196.5 v1@5680.5,4169.5 ; v1@5680,4162.72 5697,4145.72 v1@5697,3642
  other v1: 5680,4169 5242,4586
FTDI_TX: D7.1 J10.7 T_TX1.1 U1.27 | length 5361.4
  Top Layer w8: v1@4431,4833 4449,4815 4551.12,4815 4583.12,4847 4736.97,4847 4838.97,4949 5067.25,4949 5128.25,4888 5275.35,4888 5305,4858.35 5305,4751.51 5242,4688.51 v1(5242,4630) ; v1(4474,2840) 4539,2775 4615,2775 v1(4655,2735) ; T_TX1.1@5240,3065 5261,3044 5546.63,3044 5732,3229.37 v1(5732,3711) ; v1(5245,3010) T_TX1.1@5245,3055 ; J10.7@5515.02,4220 v1@5682,4220
  Bottom Layer w8: v1(4431,4834) 4444.46,4820.54 U1.27@4444.46,4619.23 ; v1(4474,2840) 4514,2800 4514,2695 4503,2684 D7.1@4484,2684 ; v1(4655,2735) 4675,2715 4805,2715 4878,2788 4878,2866.72 5049.78,3038.5 5194.78,3038.5 5223.28,3010 v1(5245,3010) ; v1(5242,4630) 5518,4630 5635,4513 5744.89,4513 5790,4467.89 5790,4373 5684,4267 v1@5684,4219 ; v1(5683,4219) 5683,4207.72 5713,4177.72 5713,3736 v1@5732,3717
GBUF: R54.1 U7.42 | length 83.2
  Bottom Layer w8: U7.42@3307.84,4473.57 3307.84,4437.16 3330,4415 R54.1@3330,4399.53
GND: ANT1.2 ANT1.3 ANT1.4 ANT1.5 C1.1 C2.1 C3.1 C4.1 C5.1 C6.1 C7.1 C8.1 C9.1 C10.1 C11.1 C12.1 C13.1 C14.1 C15.1 C16.1 C17.1 C18.1 C19.1 C20.1 C21.1 C22.1 C23.1 C24.1 C25.1 C26.1 C28.1 C29.2 C30.2 C31.1 C32.1 C33.1 C34.1 C35.2 C36.1 C37.1 C38.2 C39.2 C40.2 C41.1 C42.2 D4.2 IR0.2 IR1.2 IR2.2 IR3.2 IR4.2 IR5.2 IR6.2 IR7.2 J1.3 J1.5 J1.9 J3.4 J3.5 J3.6 J3.7 J3.8 J3.9 J4.25 J4.26 J6.1 J7.6 J10.15 J10.16 Q1.2 Q2.2 R6.1 R12.1 R33.1 R35.1 R36.2 R38.2 R40.2 R42.2 R47.1 R50.1 R61.1 R62.1 SW1.2 SW2.2 SW3.2 SW4.2 T_GND1.1 U1.4 U1.9 U1.15 U1.21 U1.33 U1.39 U1.41 U1.42 U1.45 U1.50 U1.54 U1.57 U1.63 U1.65 U1.69 U1.76 U1.82 U1.85 U1.86 U1.87 U1.94 U1.97 U2.4 U2.5 U2.8 U3.7 U3.18 U3.21 U3.25 U3.26 U4.8 U5.1 U5.2 U5.7 U5.18 U5.23 U5.31 U5.32 U5.33 U6.8 U6.14 U6.17 U6.20 U7.4 U7.9 U7.10 U7.11 U7.12 U7.16 U7.20 U7.21 U7.22 U7.25 U7.33 U7.35 U7.36 U7.37 U7.40 U7.41 U7.47 U8.7 U8.9 U9.2 XTAL1.2 XTAL1.4 XTAL2.2 XTAL2.4 XTAL3.2 XTAL3.4 | length 32984.2
  Top Layer w8: C13.1@2317.53,3331.81 IR2.2@2385.81,3331.81 ; C12.1@2327.47,4724.53 IR1.2@2382,4670 ; C14.1@3278.19,2332.47 IR3.2@3330,2384.28 ; IR0.2@3336.81,5613.81 C11.1@3336.81,5672.47 ; v1(3342,3145) SW2.2@3342,3204 ; v1@3490,3238 3490,3264 v1@3715,3264 ; J3.4@3715.93,2329.04 J3.4@3715.93,2347 ; v1@3990,3262 4045,3207 SW3.2@4090,3207 ; v1@4055,2635 v1(4055,2703) ; 4170,5625 T_GND1.1@4170,5675 ; v1@4487,4406 v1@4487,4478 ; v1(4490,4170) 4490,4107 v1@4503,4094 ; v1@4513,4097 4564,4097 4597,4130 4671,4130 v1@4705,4096 ; v1@4562.57,4546.57 4497,4481 4747.72,4481 4800.72,4428 4845,4428 ; 4610,5580 4610,5340 v1(4630,5320) ; IR7.2@4667,5612 4705,5650 C17.1@4725.32,5650 ; v1@4702,4094 v1@4778,4094 ; v1@4780,4095 4800,4115 v1(4850,4115) ; v1(4840,3160) SW4.2@4840,3204 ; v1@4887,4308 4887,4323 4845,4365 4845,4428 ; v1(4887,4428) 4845,4428 ; v1(4930,3950) 4944,3936 4960.88,3936 5113.88,3783 5193,3783 v1@5242,3734 ; v1(5037,3160) 5037,3032 v1(5061,3008) ; v1@5189.2,3464.38 5146,3374 J1.9@5206.29,3345.62 ; v1@5190,3464 J1.5@5249.27,3436.78 ; v1@5189.98,3466.02 5211,3510 J1.3@5270.57,3482.46 ; v1(5285,5095) 5350,5095 5380,5125 v1(5380,5199)
  Top Layer w15: 2405,4205 v1(2635,4205) ; v1(2695,3080) 2695,3115 ; v1(2720,4205) 2743.27,4228.27 J7.6@2811.02,4228.27 ; 3380,4560 3380,4615 ; J3.4@3715.93,2329.04 J3.5@3744,2323 ; J3.5@3746.86,2307.83 3815,2307.83 J3.9@3826.11,2307.83 ; J3.5@3746.86,2328.09 3759,2390 ; C15.1@4668,2329 IR4.2@4668,2390 ; IR6.2@5608,4664 5576,4632 5576,4545.53 5790,4331.53 v1(5790,4290) ; IR5.2@5611,3333 5611,3309 5639,3281 C16.1@5646,3281
  Top Layer w20: IR1.2@2391,4668 IR1.2@2405,4668 ; v1(2452,4097) 2405,4144 2405,4205 IR1.2@2405,4668 ; 2460,3404 IR2.2@2389,3333 2355,3299 2355,3235 2475,3115 2695,3115 2725,3115 2875,2965 2979.79,2965 3333,2611.79 IR3.2@3333,2392 ; v1(2750,4705) 2475,4705 2438,4668 IR1.2@2405,4668 ; IR0.2@3333,5610 3390,5553 ; 3347,5285 v1(3347,5466) 3347,5503 3445.27,5601.27 3469,5625 4170,5625 v1(4300,5625) 4455,5625 4500,5580 4610,5580 4636,5580 IR7.2@4667,5611 IR7.2@4655,5611 ; J3.7@3530,2239 J3.6@3530,2348.28 ; J3.6@3543.89,2362.17 3543.89,2423.89 3698.89,2423.89 3732.78,2390 3759,2390 4000,2390 ; v1(3803.5,4769) 4291,4769 v1@4300,4778 ; J3.8@3815,2206.2 J3.9@3815,2307.83 ; J3.9@3826.11,2307.83 3826.11,2388.89 ; v1(4000,2340) 4000,2390 ; v1(4000,2440) 4000,2390 ; SW1.2@4335.6,2332.97 v1(4351,2275) ; J10.16@5354.98,4420 v1(5355,4667) ; IR6.2@5608,4664 C18.1@5682,4664
  Top Layer w29: J10.16@5354.98,4420 J10.15@5515.02,4420
  Bottom Layer w8: R47.1@2460.47,3770 2460.47,3845.47 2482.31,3867.31 C20.1@2482.31,3880 C23.1@2482.31,3910 2504.16,3931.84 v1@2578.16,3931.84 ; v1@2525,3833.32 U6.17@2612.24,3833.32 ; v1(2582,3928) 2602.01,3928 2612.24,3917.76 U6.20@2612.24,3892.37 ; v1(2610,3718) 2631.69,3718 2670.31,3756.62 U6.14@2670.31,3775.24 ; v1@2614,3717 2647,3684 C28.1@2647,3659.69 ; C25.1@2760,3629 C26.1@2789,3629 ; U6.8@2767.76,3853 2834,3853 2850,3869 C21.1@2850,3880 ; C26.1@2798,3629 v1@2839,3629 ; C21.1@2851.68,3883 XTAL2.4@2931,3883 ; v1(2865,4685) C42.2@2865,4722.44 ; C34.1@2908.18,4822.87 2908.18,4806.82 2918,4797 U9.2@2918,4780.56 ; C34.1@2908.32,4823.68 v1(2908.32,4863.32) ; XTAL2.4@2909,3907 v1(2909,3946) 2923,3960 C22.1@2960.31,3960 ; C24.1@2969.68,3645 v1@3008,3645 ; Q2.2@3009.69,4668.15 C32.1@3009.69,4725 v1@3009.69,4770.31 ; v1@3014.74,3654.74 XTAL2.2@3014.74,3706.26 ; v1(3115,4290) 3129,4304 C40.2@3129,4349.31 R62.1@3172.69,4349.31 ; U7.12@3135,4744.83 v1(3135,4775) ; U7.4@3137.57,4584.79 3241.79,4584.79 ; U7.9@3137.57,4683.21 U7.12@3137.57,4742.27 ; C30.2@3180,4995.31 3180,4979.01 3195,4964.01 v1@3195,4947 ; v1@3195.74,4943.26 XTAL3.2@3251.26,4943.26 ; U7.47@3209.42,4473.57 3209.42,4509.42 3241.79,4541.79 3241.79,4584.79 ; v1(3248.79,4721.21) U7.16@3248.79,4794.43 ; C37.1@3258,4354.32 C36.1@3286.69,4354.32 ; v1(3274.22,4303.73) 3288,4317.51 C36.1@3288,4354.32 ; C41.1@3275.31,4214.84 C38.2@3275.31,4265 ; U7.41@3327.53,4463.51 v1@3327.53,4547.47 ; U7.20@3328,4791 U7.21@3347,4791 ; v1(3330,4545) 3347.21,4527.79 U7.40@3347.21,4473.57 ; v1(3342,3145) 3366,3145 3450,3229 v1(3485,3229) ; v1@3347.21,4734 U7.21@3347.21,4794.43 ; U7.21@3348.65,4793 U7.22@3368.68,4793 ; U7.37@3406.27,4473.57 C35.2@3501.01,4473.57 ; XTAL3.4@3416,5038 v1@3468,5038 ; R61.1@3426.31,4349.31 C39.2@3466,4349.31 3499.31,4349.31 v1(3515,4365) ; v1@3437.28,3446 3452.07,3431.21 U5.23@3505.57,3431.21 ; U7.25@3455,4742.27 v1(3455,4775) 3480,4800 3480,4825 3515,4825 C31.1@3515,4809.69 ; U7.36@3458.43,4525.73 U7.35@3438.75,4545.42 ; U7.35@3458.43,4545.42 U7.35@3438.75,4545.42 ; U7.33@3458.43,4584.79 3406.73,4584.79 ; v1(3468,5037) 3480,5025 C29.2@3480,4984.69 ; U5.18@3505.57,3332.79 U5.33@3555.79,3332.79 ; C19.1@3575,3592.56 3673.44,3592.56 3692,3574 R35.1@3692,3547 ; U5.31@3653.21,3480.43 3653.21,3510.21 3673.21,3510.21 3691,3528 R35.1@3691,3543 ; U5.32@3673,3480.43 3673,3510 ; U5.7@3702.43,3332.79 3759.79,3332.79 v1@3774,3347 ; U5.2@3702.43,3431.21 3726.07,3431.21 3738.43,3443.57 v1@3738.43,3467.43 ; U5.1@3702.43,3450.9 3737.9,3450.9 ; v1@3715,3264 v1@3990,3264 ; U3.26@3874.84,2505 U3.25@3900.43,2505 ; U3.25@3900,2504.57 3900,2470 3884.69,2454.69 C10.1@3884.69,2440 v1(4000,2440) 4066.12,2440 4079.57,2453.45 U3.18@4079.57,2503.57 ; U3.7@3977.2,2774.45 3977.2,2725.8 4000,2703 v1(4055,2703) ; v1@4002.8,2442.8 U3.21@4002.8,2505.55 ; v1@4068,2631 4089,2610 4089,2559 4079.57,2549.57 U3.18@4079.57,2505.55 ; C3.1@4227.44,4340 4227.44,4362.44 4234.72,4369.72 4309.28,4369.72 4318.63,4360.37 4426.37,4360.37 4474,4408 v1@4484,4408 ; C5.1@4285.52,4478.48 v1@4489,4478.48 ; v1@4355,2275 4355,2322.63 4458,2425.63 4458,2475 4404,2529 R12.1@4384,2529 ; U1.4@4362.77,4143.83 4463.83,4143.83 v1(4490,4170) ; U1.9@4362.77,4242.26 4440.26,4242.26 4486,4288 v1@4486,4408 ; U1.97@4483.83,4022.77 4483.83,4068.83 v1@4511,4096 ; v1@4513,4097 4533,4097 4542.89,4087.11 U1.94@4542.89,4022.77 ; v1@4562.57,4547.43 C7.1@4562.57,4717.57 ; v1(4630,5320) 4798,5320 4828,5290 4828,5252.47 ; 4644,5110.2 U2.5@4733.2,5110.2 ; 4680.25,3825.25 4740.25,3825.25 4771.5,3856.5 4771.5,3891.22 4789.69,3909.41 C6.1@4789.69,3930 4789.69,3955.31 4779.11,3965.89 U1.82@4779.11,4022.77 ; 4680.69,4549.31 4725,4505 4798.8,4505 ; 4680.69,4551.06 U1.39@4680.69,4619.23 ; U1.86@4700,4022.4 4700,3946.77 ; v1(4701,4094) 4701,4121 4658,4164 4658,4274 4705,4321 4800,4321 ; U2.8@4716.64,5035 4644,5035 4644,5135.8 U2.4@4733.2,5135.8 4801.27,5135.8 R6.1@4805,5139.53 ; 4720.06,4510.06 U1.41@4720.06,4619.23 ; U1.41@4721.77,4619.23 U1.42@4739.74,4619.23 ; R6.1@4814,5131 4828,5145 4828,5250 ; v1@4826,4738 4818.69,4745.31 4798.8,4745.31 4798.8,4505 ; v1(4826.74,4738.26) XTAL1.4@4881.26,4738.26 ; v1(4840,3160) v1(5037,3160) ; v1(4850,4115) 4897.22,4067.78 4897.22,3977.78 4920,3955 R42.2@4990,3955 ; v1@4883,4428 4856,4428 4825,4459 4825,4505 ; v1@4886,4294 4886,4321 ; v1(4887,4428) 4898.11,4439.11 U1.57@4959.23,4439.11 ; U1.50@4897.22,4644 4897.22,4505 ; v1@4900,4281.63 U1.65@4959.23,4281.63 ; U1.54@4959.23,4498.17 4915,4498.17 4908.17,4505 4897.22,4505 ; v1(4982,4833) XTAL1.2@5063,4833 ; 5061,2971 v1(5061,3008) ; C4.1@5074,4344 5074,4334 5061,4321 U1.63@4959.23,4321 4886,4321 ; C8.1@5112,4221 5112,4204 5093,4185 5047,4185 5029.11,4202.89 4851.74,4202.89 4800,4254.63 4800,4321 ; 5120,4670 C2.1@5120,4700.31 ; v1(5183,3468) 5207,3492 5207,3695 v1@5245,3733 ; R38.2@5385.47,5150 v1@5385.47,5193.53 ; 3241.79,4584.79 3282,4625 v1(3315,4625) 3340.72,4625 3380.93,4584.79 3406.73,4584.79 ; 3406.73,4584.79 3406.73,4545.42 U7.35@3438.75,4545.42 ; 4700,3946.77 4680.69,3966.08 U1.87@4680.69,4022.77 U1.86@4700.37,4022.77 U1.85@4720.06,4022.77 4720.06,3966.82 4700,3946.77 ; 4798.8,4505 4825,4505 ; 4800,4321 4886,4321 ; 4825,4505 4897.22,4505
  Bottom Layer w12: IR1.2@2390,4670 2540.47,4519.53 R36.2@2540.47,4470 ; 3780,3963.6 Q1.2@4012.43,3963.6 4048.6,3963.6 4056.47,3971.47 R33.1@4082,3971.47 ; U4.8@4697.8,3674.57 4655.43,3674.57 4630,3700 4630,3775 4680.25,3825.25 4680.25,3927.02 4700,3946.77
  Bottom Layer w15: v1(2635,4205) v1(2720,4205) ; R40.2@2695,3039.53 v1(2695,3080) ; U8.9@2990,4350 3002.8,4362.8 U8.7@3002.8,4439.57 ; C38.2@3274.22,4265.78 v1(3274.22,4303.73) ; v1@3458.43,4475.57 U7.36@3458.43,4525.73 ; J3.6@3545,2363.28 3545,2470 3555,2480 C9.1@3555,2510 ; R35.1@3693,3542 v1@3737,3542 ; v1@4355,2270 4430,2270 4485,2325 ; 4485,2325.47 4555.77,2396.23 IR4.2@4659.77,2396.23 ; IR4.2@4668.19,2385.81 4698,2356 4821,2356 4897.5,2432.5 4897.5,2858.64 5008.86,2970 5251.67,2970 5335,3053.33 5335,3067.23 5553.89,3286.11 5564.11,3286.11 IR5.2@5611,3333 ; U1.86@4700.37,4022.77 v1@4700.37,4090.37 ; U1.50@4902,4617 v1@4933,4617 ; IR5.2@5613,3331 5677,3331 5800,3454 5800,3712.3 5766,3746.3 5766,4188 5790,4212 v1(5790,4290)
  Bottom Layer w20: v1(2430,3954) 2452,3976 v1(2452,4097) ; v1(2750,4705) 2750,5019 2801,5070 2801,5308.4 2958.6,5466 v1(3347,5466) ; v1@3192.5,2762.5 3245,2815 3370,2815 3390.2,2794.8 D4.2@3390.2,2769.68 ; v1@3737,3542 3760,3565 R50.1@3760,3831.53 ; R50.1@3760,3832.47 3760,3880 3780,3900 3780,3963.6 ; 3780,3965 3780,4445 3803.5,4468.5 v1(3803.5,4769) ; v1(4000,2340) 4035,2305 4320,2305 v1@4350,2275 ; J4.25@4300,5350.02 v1(4300,5625) ; v1@4301,4780 J4.26@4301,5188.98 ; IR7.2@4667,5611 4667,5513 4715,5465 J6.1@4885,5465 4981,5465 5305.5,5140.5 5305.5,5100 ; v1@4933,4617 5065,4617 5115,4667 v1(5355,4667) IR6.2@5611,4667 ; v1@5290,5100 5305.5,5100 ; IR6.2@5619,4675 5647,4703 5647,4768 5596,4819 5513.89,4819 5484.89,4848 5452,4848 5305.5,4994.5 5305.5,5100
  Bottom Layer w29.12: J4.26@4300,5189.98 J4.25@4300,5350.02
  other v1: 4056,2634 3190,2760 3715,3265 3990,3265 2525,3316 2933,3343 3776,3347 3435,3446 3742,3470 2985,3521 2448,3527 3737,3541 2840,3630 3013,3642 2440,3690 5245,3734 2525,3830 4779.11,4092.89 4512,4096 4887,4293 4486,4410 3459,4475 4489,4478 4565,4545 4933,4616 3347,4734 4301,4773 3005,4775 3195,4944
  other v2: 3556.76,3334.76 3604,3334.76 3651.24,3334.76 3556.76,3382 3604,3382 3651.24,3382 3556.76,3429.24 3604,3429.24 3651.24,3429.24 2966.38,4326.38 3013.62,4326.38 2966.38,4373.62 3013.62,4373.62
I2C_SCL: J4.22 J10.13 U5.25 | length 5559.8
  Top Layer w8: v1(3615,3710) 3650,3675 4171,3675 4256,3590 4350,3590 4440,3500 4911,3500 v1@5062,3349 ; v1@3671.19,4879 v1@4230,4879 ; v1(5278,3683) 5483,3683 5613,3813 5613,3985 5595,4003 v1(5569,4003) ; J10.13@5515.02,4370 v1(5591,4370)
  Bottom Layer w8: U5.25@3535.1,3480.43 3514.57,3480.43 3475,3520 3475,3620 3535,3680 3585,3680 v1(3615,3710) 3650,3745 3650,4019.8 3684,4053.8 3684,4841 3668.81,4856.19 v1@3668.81,4876.62 ; J4.22@4200,5189.98 4200,5124 4231,5093 v1@4231,4880 ; v1(5060,3352) 5134.63,3352 5260,3477.37 5260,3662 v1@5278,3680 ; v1(5569,4003) 5591,4025 v1(5591,4370)
  other v1: 3670.5,4878.31 4232,4879
I2C_SDA: J4.20 J10.14 U5.26 | length 5671.8
  Top Layer w8: v1@3660,3711 3680,3691 4181.49,3691 4258.49,3614 4359.37,3614 4457.37,3516 4917.63,3516 5038.31,3395.31 v1(5059.69,3395.31) ; v1(3675,4925) 3724.37,4925 3752.37,4897 4146,4897 v1@4160,4911 ; v1(5260,4050) 5305,4005 5506,4005 5597,3914 5597,3819.63 5476.37,3699 5323,3699 v1(5288,3734) ; v1(5279,4370) J10.14@5354.98,4370
  Bottom Layer w8: U5.26@3554.79,3480.43 3554.79,3501.84 3546.63,3510 3510,3510 3495,3525 3495,3610 3546,3661 3611,3661 v1(3660,3710) 3670.5,3720.5 3670.5,4017.67 3700,4047.17 3700,4900 v1(3675,4925) ; J4.20@4150,5189.98 4150,5111.35 4164,5097.35 v1@4164,4914 ; v1(5059.69,3395.31) 5155.31,3395.31 5244,3484 5244,3691.28 5274.5,3721.78 ; v1(5260,4050) 5278,4068 v1@5278,4367
  other v1: 4160,4910
IR_EMIT_0: R20.2 T_T1.1 U4.15 | length 4171
  Top Layer w8: T_T1.1@3745,5870 R20.2@3825.47,5870 3825.47,5800.53 3846,5780 4709,5780 4906,5583 v1@4906,5555 ; v1(4994,3521) 5068,3447 v1@5079,3447 ; v1(5416,4479) 5384,4511 5384,4614 5414,4644 5414,4699 5517,4802 v1(5517,4869)
  Bottom Layer w8: U4.15@4895.76,3521 v1(4994,3521) ; v1(4905,5555) 4922.11,5555 5327.5,5149.61 5327.5,5003.61 5448.11,4883 5503,4883 v1(5517,4869) ; v1@5079.5,3447.5 5127,3495 5127,3683 5310,3866 5310,4365 v1@5420,4475
  other v1: 5078,3448
IR_EMIT_1: R21.2 U4.1 | length 3457.9
  Top Layer w8: R21.2@2629,5176 v1@2682.24,5176 ; v1(2820,4500) 2921,4399 2921,4202.28 2998.28,4125 3025,4125 3130,4020 3130,3735 3190,3675 3465,3675 3530,3740 3671.72,3740 3704.72,3707 4188.12,3707 4265.12,3630 4366,3630 4443,3553 v1@4477,3553
  Bottom Layer w8: v1@2677.76,5181.24 2726,5133 2726,4761 2712,4747 2712,4608 v1(2820,4500) ; v1(4478,3553) 4509,3522 4638,3522 4664,3496 U4.1@4722,3496
  other v1: 2676,5182.24
IR_EMIT_2: R22.2 U4.2 | length 2743.5
  Top Layer w8: R22.2@2314.53,3920 2314.53,3974.06 2345,4004.53 2740.47,4004.53 2760.5,3984.5 3050.5,3984.5 3090,3945 v1(3090,3820) ; v1(3300,3820) 3348,3772 3684.97,3772 3715.97,3741 4199.37,3741 4278.37,3662 4448,3662 4515,3595 4540,3595 v1(4583,3552)
  Bottom Layer w8: v1(3090,3820) 3100.5,3830.5 3288.5,3830.5 v1@3299,3820 ; v1@4585,3550 4632.63,3550 4661.63,3521 U4.2@4713,3521
IR_EMIT_3: R23.2 U4.3 | length 2882.5
  Top Layer w8: R23.2@3019.53,2580 3092,2580 3153,2641 v1(3153,2713) ; v1(3200,3710) 3475,3710 3521,3756 3678.35,3756 3709.35,3725 4192.75,3725 4271.75,3646 4424,3646 v1@4461,3609
  Bottom Layer w8: v1(3153,2713) 3153,2876 3125,2904 3125,3255 3200,3330 v1(3200,3710) ; v1@4473,3597 4488,3582 4624.37,3582 4660.37,3546 4697.8,3546 U4.3@4723,3546
  other v1: 4466,3602
IR_EMIT_4: R24.2 T_T2.1 U4.4 | length 2076.5
  Top Layer w8: R24.2@4164.53,2130 4164.53,2180.47 4185,2200.94 T_T2.1@4185,2255 4185,2640 4225,2680 v1(4225,2745) ; v1(4355,3700) 4408,3700 4430,3678 4496,3678 v1(4543,3631)
  Bottom Layer w8: v1(4225,2745) 4225,2871.72 4369,3015.72 4369,3651.25 4355,3665.25 v1(4355,3700) ; v1(4543,3631) 4598,3631 4657,3572 U4.4@4718,3572
IR_EMIT_5: R25.2 U4.5 | length 1042.4
  Top Layer w8: v1(4843,3462) 4898,3462 5089.5,3270.5 5089.5,3060.5 R25.2@5299.12,2850.88
  Bottom Layer w8: U4.5@4726.34,3597.8 4772.2,3597.8 4783,3587 4783,3520 v1@4841,3462
IR_EMIT_6: R26.2 U4.6 | length 1608.9
  Top Layer w8: v1@5061,3875 5137,3799 v1@5469,3799 ; v1(5639.36,3797.64) v1(5800,3797.64) ; v1(5800,4142) 5823,4165 5835,4165 R26.2@5844.12,4155.88
  Bottom Layer w8: U4.6@4720,3623 4750,3623 5005,3878 v1@5062,3878 ; v1@5472,3798 v1@5639,3798 ; v1@5800,3805.28 v1(5800,4142)
  other v1: 5472,3796 5062,3877
IR_EMIT_7: R27.2 U4.7 | length 1989.3
  Top Layer w8: v1(5125,3965) 5230,3965 v1(5261,3934) ; v1(5210,4556) 5196,4570 5196,4689 5257,4750 v1(5257,4842) ; v1@5242.5,5006.5 5267.5,5031.5 5267.5,5070.22 5245,5092.72 R27.2@5245,5145.47
  Bottom Layer w8: U4.7@4710,3650 4750,3650 5015,3915 5085,3915 5125,3955 v1(5125,3965) ; v1(5210,4556) 5210,4330 5223,4317 5223,4037 5261,3999 v1(5261,3934) ; v1@5237,5004 5257,4984 v1(5257,4842)
  other v1: 5238,5005
IR_RECV_0: IR0.1 T_IR1.1 U1.10 | length 3885.7
  Top Layer w8: T_IR1.1@3185,5515 IR0.1@3238,5568 ; v1(3545,5525) 3570,5550 4405,5550 v1@4575,5380 ; v1(4285,4235) 4310,4235 4320,4245 4732.72,4245 4773.22,4204.5 4905.5,4204.5 4965,4264 4965,4475.37 v1(4730,4710.37)
  Bottom Layer w8: IR0.1@3240.61,5568.39 3303,5506 3526,5506 v1(3545,5525) ; v1(4285,4235) 4311.94,4261.94 U1.10@4362.77,4261.94 ; v1(4580,5380) 4605,5355 4655,5355 4674,5336 4805.37,5336 4915,5226.37 4915,5027 4715,4827 4715,4725.37 v1(4730,4710.37)
IR_RECV_1: IR1.1 U1.11 | length 2637.3
  Top Layer w8: v1(3490,3935) 3515,3910 4128,3910 4138,3920 4215,3920 4250,3955 v1(4260,3955)
  Bottom Layer w8: IR1.1@2356.73,4577.61 2356.73,4553.27 2670,4240 2770,4240 2961,4049 3041,4049 3150.5,3939.5 v1@3485.5,3939.5 ; v1(4260,3955) 4244.5,3970.5 4244.5,4246.87 4275.91,4278.28 4317.54,4278.28 4320.88,4281.63 U1.11@4362.77,4281.63
IR_RECV_2: IR2.1 U1.12 | length 3577.8
  Top Layer w8: IR2.1@2427.27,3240.61 2502.88,3165 2770,3165 2948,2987 2988.9,2987 3135.9,2840 3510,2840 3620,2950 v1(3670,2950)
  Bottom Layer w8: v1(3670,2950) 3705,2950 3719,2936 3891,2936 3960,3005 4191.35,3005 4302,3115.65 4302,3533 4279.5,3555.5 4199.5,3555.5 4177.63,3577.37 4177.63,3838.28 4228,3888.65 4228,4253 4269.28,4294.28 4310.91,4294.28 4317.94,4301.31 U1.12@4362.77,4301.31
IR_RECV_3: IR3.1 U1.13 | length 2983.1
  Top Layer w8: IR3.1@3425.39,2350.73 3425.39,2399.61 3360.5,2464.5 3360.5,2740.5 3444,2824 3554,2824 v1(3630,2900)
  Bottom Layer w8: v1(3630,2900) 3630,2951.72 3657.78,2979.5 3701.5,2979.5 3720.5,2960.5 3845.5,2960.5 3906,3021 4184.72,3021 4286,3122.28 4286,3524 4270.5,3539.5 4190.5,3539.5 4161.63,3568.37 4161.63,3844.91 4212,3895.28 4212,4266.5 4255.78,4310.28 4304.28,4310.28 4315,4321 U1.13@4362.77,4321
IR_RECV_4: IR4.1 T_IR2.1 U1.95 | length 1896.4
  Top Layer w8: IR4.1@4768.27,2427.27 4795,2454 T_IR2.1@4860,2454
  Bottom Layer w8: U1.95@4523.2,4022.77 4523.2,3882.8 4534,3872 4534,3729 4436.5,3631.5 4436.5,3393.5 4560,3270 4560,3060.37 4536.5,3036.87 4536.5,2931.13 4596,2871.63 4596,2590.66 IR4.1@4759.39,2427.27